# Allegro board Raspberry_Pi_Shield.brd
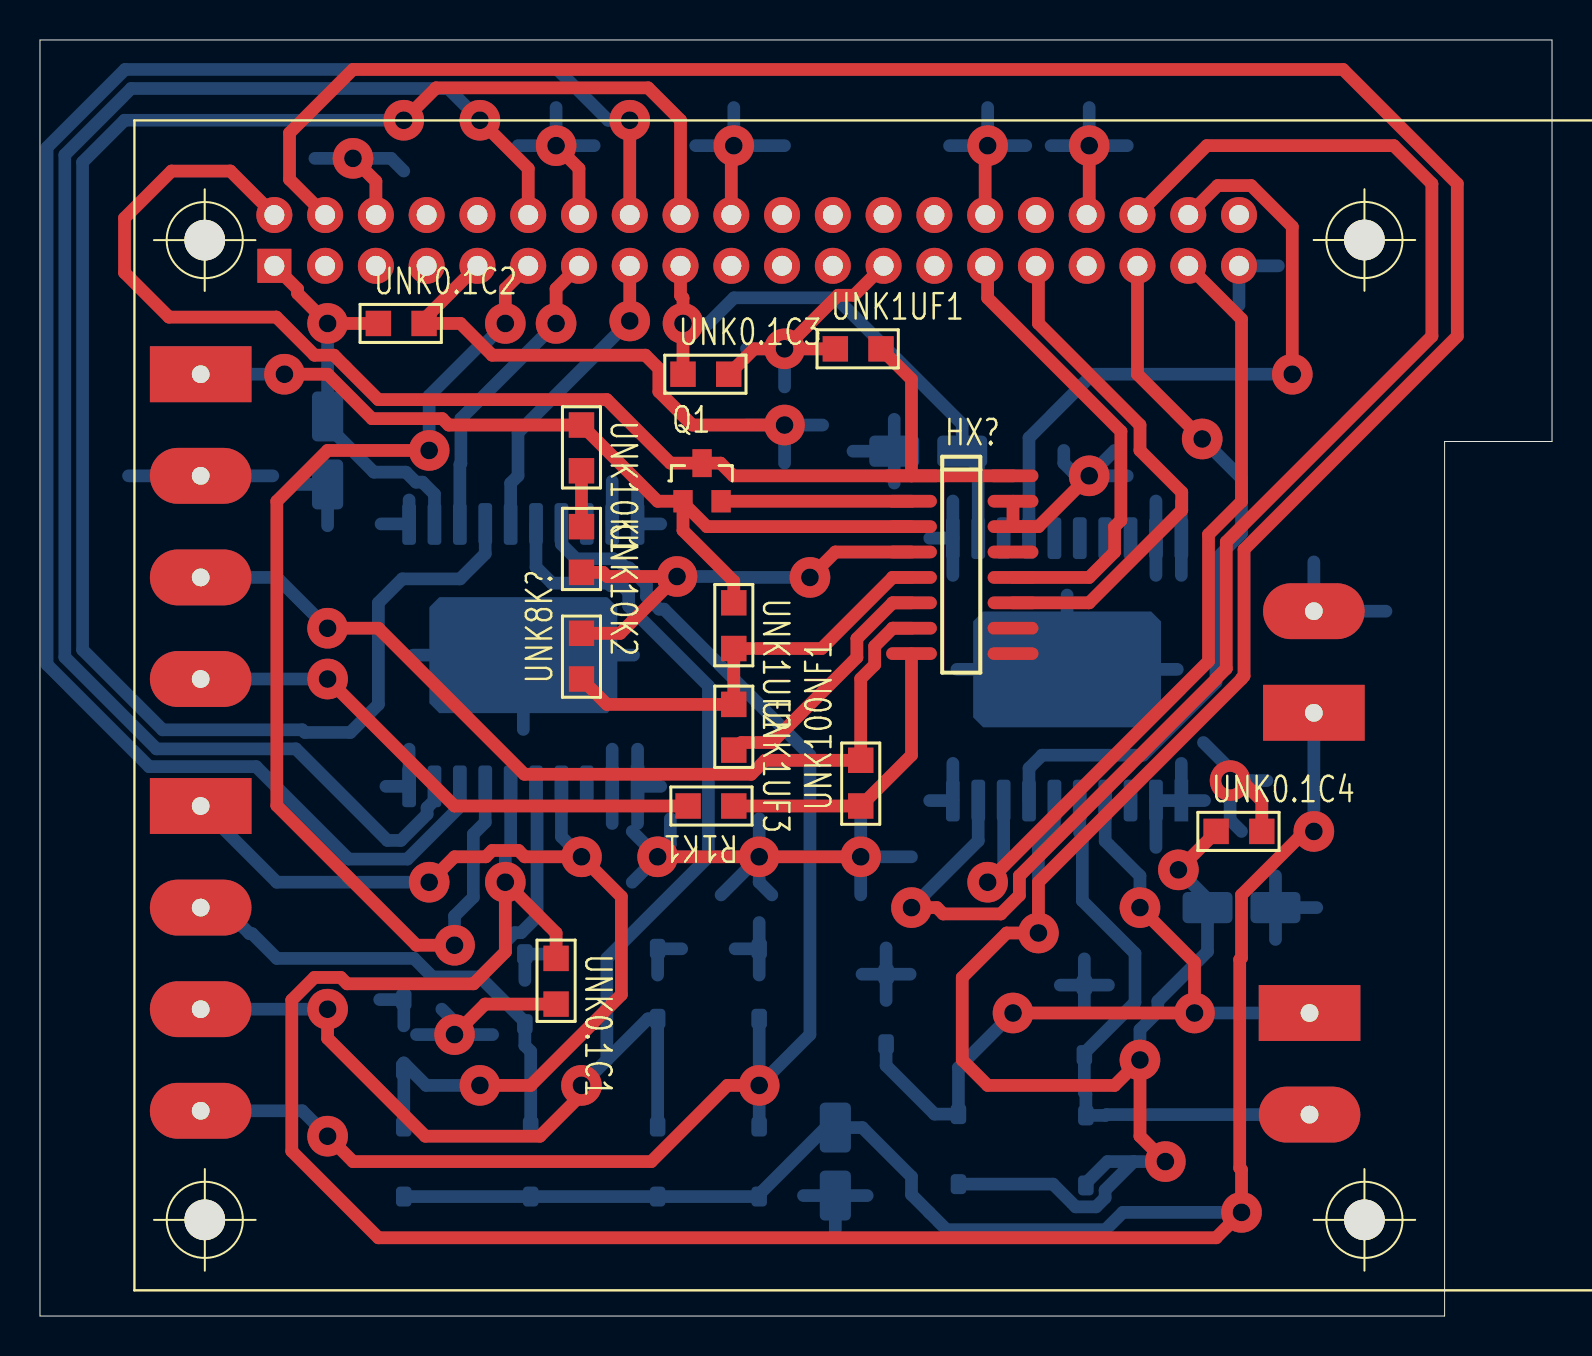
[diagram p0: board, top side]
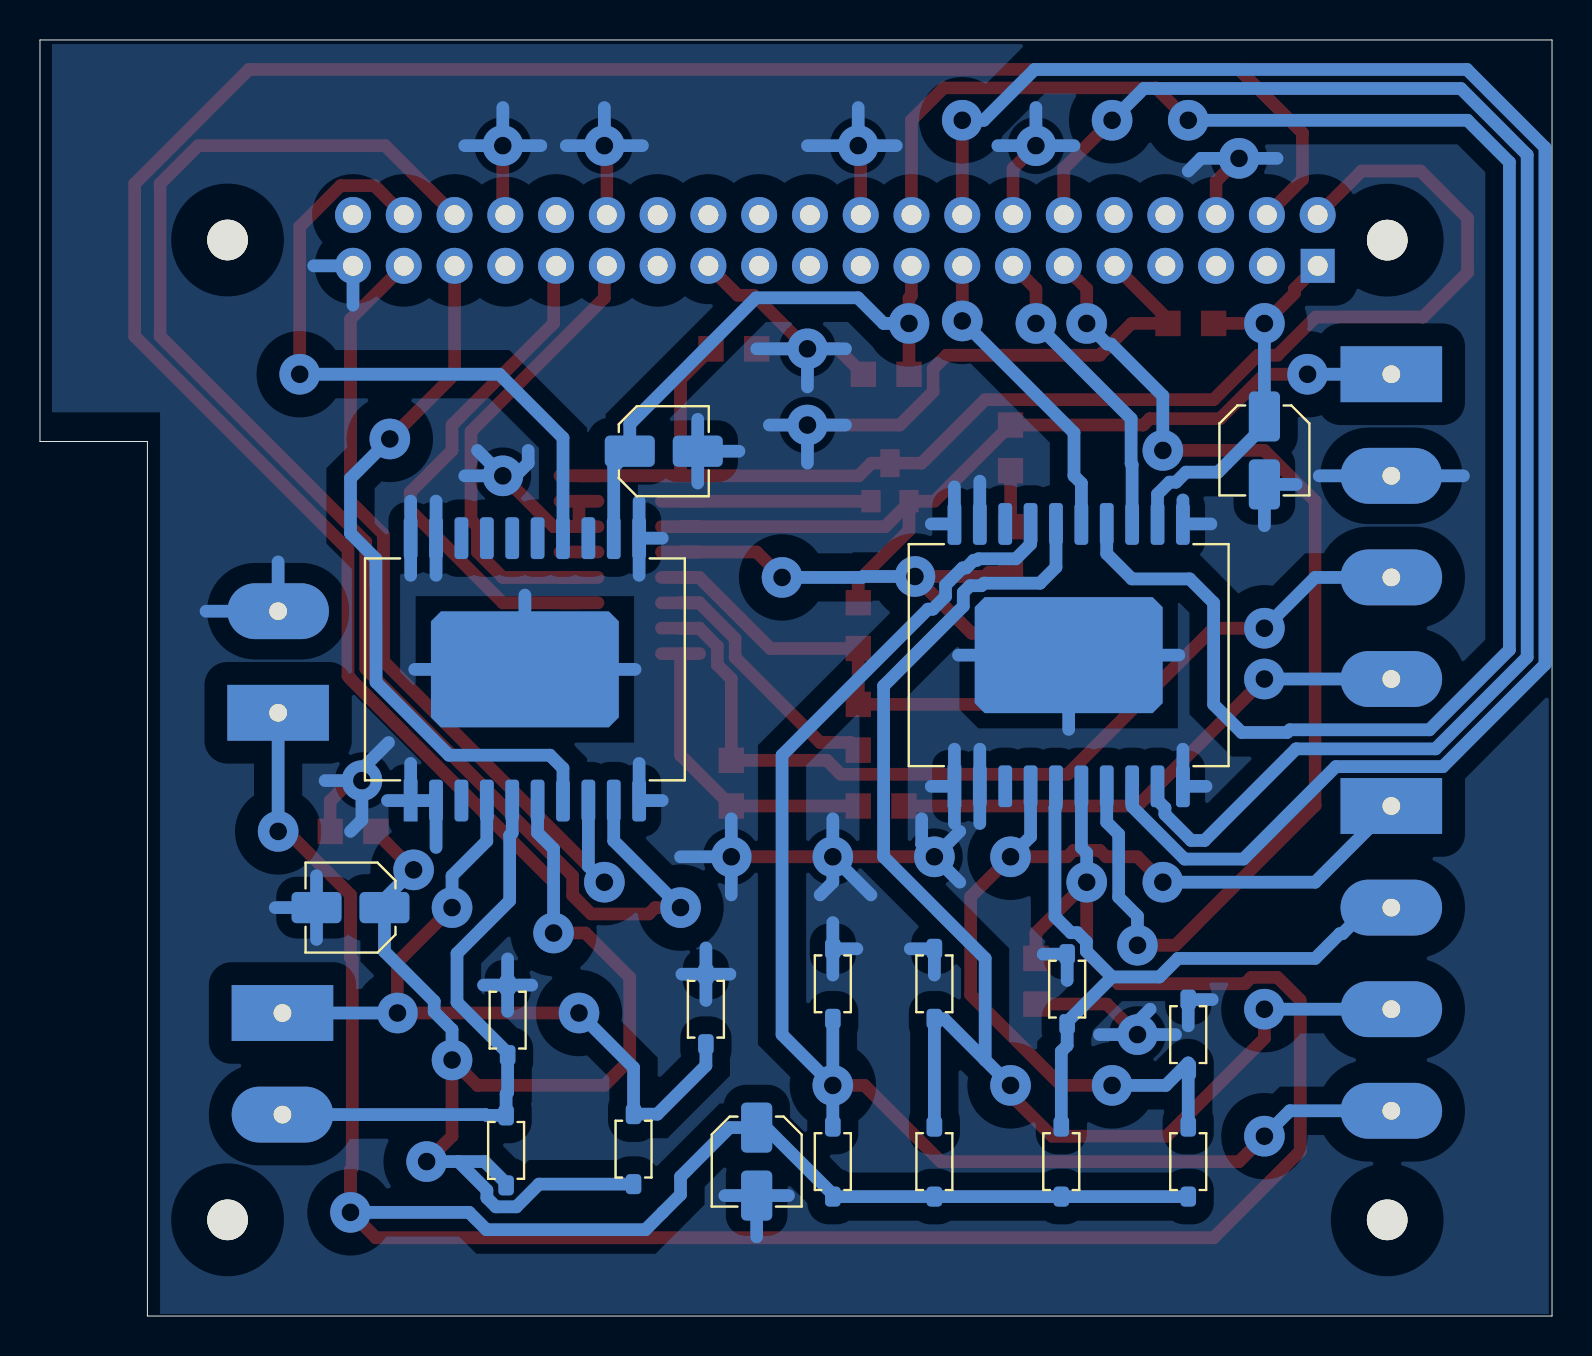
[diagram p1: board, bottom side, seen from below]

Outline 75.64 x 63.8 mm; copper layers: TOP, BOTTOM. Coordinates in mm from the lower left corner of the outline.
Outline path: 0,63.8 0,0 70.27,0 70.27,43.73 75.64,43.73 75.64,63.8 0,63.8

## Design rules (mm)
constraint set DEFAULT: min track width 0.635

## Placement (name value [footprint] x y rotation side)
D1  D_1N5814  [GU-SOD-123]  18.2 7.72 90 bottom
D2  D_1N5814  [GU-SOD-123]  24.55 7.72 90 bottom
D3  D_1N5814  [GU-SOD-123]  30.9 7.72 90 bottom
D4  D_1N5814  [GU-SOD-123]  35.98 7.72 90 bottom
D5  D_1N5814  [GU-SOD-123]  18.2 14.07 90 bottom
D6  D_1N5814  [GU-SOD-123]  24.26 16.34 90 bottom
D7  D_1N5814  [GU-SOD-123]  30.9 16.61 90 bottom
D8  D_1N5814  [GU-SOD-123]  35.98 16.61 90 bottom
D9  D_1N5814  [GU-SOD-123]  45.95 8.34 90 bottom
D10  D_1N5814  [GU-SOD-123]  52.32 8.28 90 bottom
D11  D_1N5814  [GU-SOD-123]  42.33 15.34 90 bottom
D12  D_1N5814  [GU-SOD-123]  52.25 14.8 90 bottom
HX?  HX711  [GU-SOIC16]  43.6 42.01 270 top
L1  L298  [GU-L298-POWERSO20]  24.18 33.05 180 bottom
L2  L298  [GU-L298-POWERSO20]  51.38 32.33 180 bottom
NOREF  -  [unnamed]  66.26 4.81 0 top
NOREF#2  -  [unnamed]  66.26 53.8 0 top
NOREF#3  -  [unnamed]  8.24 53.8 0 top
NOREF#4  -  [unnamed]  8.25 4.81 0 top
Q1  PNP_Transistor  [GU-SOT23]  32.17 40.74 0 top
R1K1  R1K  [GU-R0805]  34.71 25.5 180 top
U1  Pi Header  [GU-RASP-PI-3]  4.72 1.28 0 top
U9  connector2  [GU-TERMINAL2-200]  63.73 30.16 180 top
U10  connector2  [GU-TERMINAL2-200]  63.51 15.15 0 top
U11  connector4  [GU-TERMINAL4-200]  8.04 47.09 0 top
U12  con4  [GU-TERMINAL4-200]  8.04 25.5 0 top
U17  Cap_e  [CAPAE430X550D460L180X65]  14.39 43.28 270 bottom
U18  Cap_e  [CAPAE430X550D460L180X65]  39.79 7.72 270 bottom
U19  Cap_e  [CAPAE430X550D460L180X65]  44.44 43.24 180 bottom
U20  Cap_e  [CAPAE430X550D460L180X65]  60.11 20.42 0 bottom
UNK0.1C1  100nF_Capacitor  [GU-C0805]  25.82 17.88 270 top
UNK0.1C2  100nF_Capacitor  [GU-C0805]  16.93 49.63 0 top
UNK0.1C3  100nF_Capacitor  [GU-C0805]  32.17 47.09 0 top
UNK0.1C4  100nF_Capacitor  [GU-C0805]  58.84 24.23 0 top
UNK1UF1  1uF_Capacitor  [GU-C0805]  39.79 48.36 0 top
UNK1UF2  1uF_Capacitor  [GU-C0805]  34.71 35.66 270 top
UNK1UF3  1uF_Capacitor  [GU-C0805]  34.71 30.58 270 top
UNK8K?  8K2_ Resistor  [GU-R0805]  27.09 31.85 90 top
UNK10K1  10K_Resistor  [GU-R0805]  27.09 44.55 270 top
UNK10K2  10K_Resistor  [GU-R0805]  27.09 39.47 270 top
UNK100NF1  100nF_Capacitor  [GU-C0805]  41.06 25.5 90 top

## Library data of the parts
D1-D12 = D_1N5814
HX? = HX711
L1 L2 = L298
Q1 = PNP_Transistor
R1K1 = R1K
U1 = Pi Header
U9 U10 = connector2: User Part Number: TERMINAL2-200
U11 = connector4: User Part Number: TERMINAL4-200
U12 = con4: User Part Number: TERMINAL4-200
U17-U20 = Cap_e
UNK0.1C1-UNK0.1C4 UNK100NF1 = 100nF_Capacitor
UNK1UF1-UNK1UF3 = 1uF_Capacitor
UNK8K? = 8K2_ Resistor
UNK10K1 UNK10K2 = 10K_Resistor

## Footprints (pads in the part's own frame, mm; a bottom-side part is the same pattern mirrored in y, then rotated)
CAPAE430X550D460L180X65
  rrect 2.5x1.56 smd: 1(-1.7,0) 2(1.7,0)
GU-C0805
  rect 1.27x1.27 smd: 1(0,0) 2(2.286,0)
GU-L298-POWERSO20
  rect 0.69x2.09 smd: 1(-5.715,-6.56)
  rrect 0.69x2.09 smd: 2(-4.445,-6.56) 3(-3.175,-6.56) 4(-1.905,-6.56) 5(-0.635,-6.56) 6(0.635,-6.56) 7(1.905,-6.56) 8(3.175,-6.56) 9(4.445,-6.56) 10(5.715,-6.56) 11(5.715,6.56) 12(4.445,6.56) 13(3.175,6.56) 14(1.905,6.56) 15(0.635,6.56) 16(-0.635,6.56) 17(-1.905,6.56) 18(-3.175,6.56) 19(-4.445,6.56) 20(-5.715,6.56)
  rrect 9.4x5.8 smd: 21(0,0)
GU-R0805
  rect 1.27x1.27 smd: 1(0,0) 2(2.286,0)
GU-RASP-PI-3
  round 1 hole 3 unplated: (3.5,52.5) (3.5,3.5) (61.5,52.5) (61.5,3.5)
  rect 1.7x1.7 hole 1: 1(7,51.23)
  round 1.8 hole 1: 2(7,53.77) 3(9.54,51.23) 4(9.54,53.77) 5(12.08,51.23) 6(12.08,53.77) 7(14.62,51.23) 8(14.62,53.77) 9(17.16,51.23) 10(17.16,53.77) 11(19.7,51.23) 12(19.7,53.77) 13(22.24,51.23) 14(22.24,53.77) 15(24.78,51.23) 16(24.78,53.77) 17(27.32,51.23) 18(27.32,53.77) 19(29.86,51.23) 20(29.86,53.77) 21(32.4,51.23) 22(32.4,53.77) 23(34.94,51.23) 24(34.94,53.77) 25(37.48,51.23) 26(37.48,53.77) 27(40.02,51.23) 28(40.02,53.77) 29(42.56,51.23) 30(42.56,53.77) 31(45.1,51.23) 32(45.1,53.77) 33(47.64,51.23) 34(47.64,53.77) 35(50.18,51.23) 36(50.18,53.77) 37(52.72,51.23) 38(52.72,53.77) 39(55.26,51.23) 40(55.26,53.77)
GU-SOD-123
  rrect 1x0.78 smd: A(1.75,0) C(-1.75,0)
GU-SOIC16
  rect 0.635x2.54 smd: 1(0,0)
  oval 0.635x2.54 smd: 2(1.27,0) 3(2.54,0) 4(3.81,0) 5(5.08,0) 6(6.35,0) 7(7.62,0) 8(8.89,0) 9(8.89,5.08) 10(7.62,5.08) 11(6.35,5.08) 12(5.08,5.08) 13(3.81,5.08) 14(2.54,5.08) 15(1.27,5.08) 16(0,5.08)
GU-SOT23
  rect 0.965x1.118 smd: 1(0,0) 2(1.905,0)
  rect 0.965x1.397 smd: 3(0.953,1.905)
GU-TERMINAL2-200
  rect 5.08x2.794 hole 0.889: 1(0,0)
  oval 5.08x2.794 hole 0.889: 2(0,-5.08)
GU-TERMINAL4-200
  rect 5.08x2.794 hole 0.889: 1(0,0)
  oval 5.08x2.794 hole 0.889: 2(0,-5.08) 3(0,-10.16) 4(0,-15.24)
unnamed
  round 2.032 hole 3.962 unplated: (0,0)

## Nets
GND: D5.A D6.A D7.A D8.A D11.A D12.A HX?.14(X1) HX?.15 L1.1 L1.2 L1.10 L1.11 L1.19 L1.20 L1.21 L2.1 L2.2 L2.10 L2.11 L2.19 L2.20 L2.21 U1.6 U1.9 U1.14 U1.20 U1.25 U1.30 U1.34 U1.39 U9.2(-) U11.2(E-) U17.2(-) U18.2(-) U19.2(-) U20.2(-) UNK0.1C1.2 UNK0.1C2.2 UNK0.1C3.2 UNK0.1C4.2 UNK1UF1.1
N03174: HX?.1 HX?.16 Q1.3 U1.2 UNK1UF1.2
N03240: HX?.2 Q1.2
N03248: HX?.3 Q1.1(E) U11.1 UNK1UF2.1 UNK10K1.1
N03368: HX?.4 UNK8K?.2 UNK10K2.2
N03376: HX?.7 U11.3 UNK100NF1.2
N03380: HX?.8 R1K1.1 UNK100NF1.1
N03420: HX?.5 UNK1UF2.2 UNK1UF3.1 UNK8K?.1
N03736: HX?.6 UNK1UF3.2
N08092: L1.12(VSS) U1.1 U17.1 UNK0.1C2.1
N08208: D1.C(OUT) D2.C(OUT) D3.C(OUT) D4.C(OUT) L1.6 U9.1 U18.1 UNK0.1C1.1
N08462: L1.7 U1.11
N08526: L1.9 U1.12
N08530: D1.A D5.C(OUT) L1.4 U12.1
N08590: L1.13 U1.13
N08598: L1.15 U1.15
N08610: D2.A D6.C(OUT) L1.5 U12.2
N08622: D3.A D7.C(OUT) L1.16 U12.3
N08718: D4.A D8.C(OUT) L1.17 U12.4(OUT4)
N08730: L1.14 U1.18
N13573: L1.8 U1.16
N22204: L2.12(VSS) U1.17 U19.1 UNK0.1C3.1
N22212: D9.C(OUT) D10.C(OUT) L2.6 U1.4 U20.1 UNK0.1C4.1
N22636: D10.A D12.C(OUT) L2.5 U10.2(-)
N22732: L2.7 U1.35
N22740: D9.A D11.C(OUT) L2.4 U10.1
N22764: L2.9 U1.36
N23100: L2.14 U1.38
N23140: L2.8 U1.37
N25484: HX?.12 U1.29
N25496: HX?.11 U1.31
N28539: R1K1.2(OUT) U11.4
N386561: UNK10K1.2 UNK10K2.1

Pads without a net: HX? 9 10 13; L1 3 18; L2 3 13 15 16 17 18; U1 3 5 7 8 10 19 21 22 23 24 26 27 28 32 33 40

## Via types
v1: diameter 2.032, hole 0.889, TOP to BOTTOM, 49 vias

## Routing (per net, layer and track width the routed paths; a pad name or vN(x,y) marks a point on that pad's centre or on a via; arc(x,y) is an arc through that point)
GND: length 287
  TOP w0.635: v1(37.25,48.36) 39.93,51.04 40.73,51.04 U1.25 ; v1(37.25,48.36) UNK1UF1.1 ; v1(37.25,48.36) 35.73,48.36 UNK0.1C3.2 ; U1.30 47.28,58.4 v1(47.41,58.52) ; UNK0.1C1.2 22.26,15.6 v1(20.74,14.07) ; UNK0.1C4.2 61.13,25.76 60.11,26.77 v1(59.54,26.77) ; v1(41.06,22.96) v1(35.98,22.96) v1(30.9,22.96) ; HX?.15 HX?.14 49.95,39.47 v1(52.49,42.01) ; U1.9 19.22,49.84 UNK0.1C2.2 21.03,49.63 22.62,48.04 30.29,48.04 30.96,47.37 30.96,46.22 32.63,44.55 v1(37.25,44.55) ; v1(34.71,58.52) 34.58,58.4 U1.20 ; v1(15.66,57.89) 16.8,56.74 U1.6 ; U1.34 52.49,55.18 v1(52.49,58.52) ; v1(25.82,58.52) 26.96,57.38 U1.14
  BOTTOM w0.635: 36.61,21.06 35.98,21.69 v1(35.98,22.96) ; 17,15.82 D5.A 18.2,14.51 ; 25.46,18.09 D6.A 24.26,16.78 ; 34.78,18.36 D8.A ; D8.A 35.98,17.05 ; D8.A 35.98,19.68 ; L2.1 57.1,27.63 ; L2.1 L2.2 55.83,23.43 ; L2.1 58.26,25.77 ; v1(30.9,22.96) 31.53,23.6 31.53,24.87 ; v1(30.9,22.96) 29.63,21.69 ; v1(30.9,22.96) 29.63,24.23 ; D12.A 53.45,16.55 ; D12.A 51.04,16.55 ; D12.A 52.25,17.86 ; D12.A 52.25,15.23 ; 41.13,17.09 D11.A ; D11.A 42.33,15.78 ; D11.A 43.53,17.09 ; D11.A 42.33,18.41 ; 17.31,26.49 L1.10 18.47,28.34 ; v1(20.74,14.07) 18.83,14.07 ; v1(20.74,14.07) 22.64,14.07 ; v1(20.74,14.07) 20.74,14.71 20.1,15.34 ; L1.1 31.05,26.49 ; L1.1 29.9,28.34 ; L1.1 29.9,24.63 ; v1(52.49,58.52) 50.58,58.52 ; v1(52.49,58.52) 54.39,58.52 ; v1(52.49,58.52) 52.49,60.43 ; v1(41.06,22.96) 41.06,24.87 ; v1(41.06,22.96) 41.06,21.06 ; v1(41.06,22.96) 43.6,22.96 ; v1(25.82,58.52) 23.91,58.52 ; v1(25.82,58.52) 25.82,60.43 ; v1(25.82,58.52) 27.72,58.52 ; 13.75,57.89 v1(15.66,57.89) 17.56,57.89 18.2,57.25 ; U19.2 42.74,44.84 ; U19.2 42.74,41.65 ; U19.2 40.67,43.24 ; v1(37.25,48.36) UNK1UF1.1 ; v1(37.25,48.36) 37.25,46.46 ; v1(37.25,48.36) 35.34,48.36 ; 30.9,17.05 D7.A 32.1,18.36 ; v1(52.49,42.01) 54.39,42.01 ; v1(52.49,42.01) 51.85,42.01 51.22,42.65 51.22,43.28 ; v1(52.49,42.01) 53.76,43.28 ; 47.41,60.43 v1(47.41,58.52) ; v1(47.41,58.52) 49.31,58.52 ; v1(47.41,58.52) 45.5,58.52 ; 4.43,42.01 U11.2 11.65,42.01 ; 61.95,52.51 U1.39 59.98,50.55 ; v1(35.98,22.96) 34.07,21.06 ; v1(35.98,22.96) 35.98,24.87 ; 34.71,60.43 v1(34.71,58.52) ; v1(34.71,58.52) 37.25,58.52 ; v1(34.71,58.52) 32.8,58.52 ; L2.11 45.67,40.75 ; L2.11 44.51,38.89 ; L2.11 45.67,37.04 ; v1(59.54,26.77) 59.54,27.34 58.2,28.68 ; v1(59.54,26.77) 61.38,26.77 ; v1(59.54,26.77) 59.54,24.8 60.11,24.23 ; 17.06,39.61 L1.11 18.47,40.81 ; 14.39,39.52 U17.2 12.8,41.58 ; 18.67,33.05 L1.21 ; L1.21 29.69,33.05 ; L1.21 24.18,29.33 ; U20.2 63.87,20.42 ; U20.2 61.81,22.01 ; U20.2 61.81,18.83 ; 39.79,3.96 U18.2 ; U18.2 41.38,6.02 ; U18.2 38.2,6.02 ; 31.05,39.61 L1.20 29.9,41.46 ; 57.1,37.04 L2.20 57.1,40.75 ; 39.15,44.55 v1(37.25,44.55) ; v1(37.25,44.55) 37.25,42.65 ; v1(37.25,44.55) 35.34,44.55 ; 44.51,25.77 L2.10 45.67,27.63 ; 55.83,40.75 L2.19 55.83,37.04 ; 63.73,37.71 U9.2 67.34,35.24 ; L2.21 51.38,36.05 ; L2.21 56.9,32.33 ; L2.21 45.87,32.33 ; 28.63,28.34 L1.2 28.63,24.63 ; L1.19 28.63,41.74
N03174: length 67.7
  TOP w0.635: HX?.1 43.6,46.84 UNK1UF1.2 ; HX?.1 34.68,42.01 34.05,42.65 31.53,42.65 28.36,45.82 16.93,45.82 14.71,48.04 13.73,48.04 11.83,49.95 6.45,49.95 4.23,52.17 4.23,54.9 6.58,57.25 9.53,57.25 U1.2 ; HX?.1 HX?.16
N03240: length 9.5
  TOP w0.635: HX?.2 Q1.2
N03248: length 44.8
  TOP w0.635: 32.17,40.67 32.17,39.28 34.71,36.74 UNK1UF2.1 ; 32.17,40.67 33.36,39.47 HX?.3 ; 32.17,40.67 Q1.1 30.9,40.74 UNK10K1.1 20.44,44.55 20.13,44.87 16.61,44.87 14.39,47.09 v1(12.23,47.09)
  BOTTOM w0.635: v1(12.23,47.09) U11.1
N03368: length 23.1
  TOP w0.635: v1(38.52,36.93) 39.79,38.2 HX?.4 ; UNK10K2.2 28.17,37.19 28.38,36.98 v1(31.87,36.98) 29.03,34.14 UNK8K?.2
  BOTTOM w0.635: v1(38.52,36.93) 34.52,36.93 34.47,36.98 v1(31.87,36.98)
N03376: length 45.6
  TOP w0.635: v1(14.39,34.39) 16.93,34.39 24.23,27.09 35.58,27.09 36.28,27.79 UNK100NF1.2 41.06,31.86 41.76,32.56 41.76,33.49 42.66,34.39 HX?.7
  BOTTOM w0.635: v1(14.39,34.39) 11.85,36.93 U11.3
N03380: length 15
  TOP w0.635: HX?.8 43.6,28.04 UNK100NF1.1 R1K1.1
N03420: length 21.3
  TOP w0.635: HX?.5 42.66,36.93 39.1,33.38 UNK1UF2.2 UNK1UF3.1 28.36,30.58 UNK8K?.1
N03736: length 12.5
  TOP w0.635: UNK1UF3.2 35.09,28.68 36.61,28.68 40.87,32.93 40.87,33.87 42.66,35.66 HX?.6
N08092: length 19.9
  TOP w0.635: U1.1 12.89,51.35 12.89,51.13 v1(14.39,49.63) UNK0.1C2.1
  BOTTOM w0.635: L1.12 19.74,41.09 19.14,41.69 18.81,41.69 18.31,42.19 16.71,42.19 14.39,44.51 U17.1 v1(14.39,49.63)
N08208: length 155.8
  TOP w0.635: v1(63.73,24.23) 63.28,24.23 60.11,21.06 60.11,17.91 60.02,17.82 60.02,7.4 60.11,7.31 v1(60.11,5.18) 58.84,3.91 16.93,3.91 12.6,8.24 12.6,15.8 13.73,16.93 15.05,16.93 15.36,16.61 21.69,16.61 23.28,18.2 v1(23.28,21.69) 25.82,19.15 UNK0.1C1.1
  BOTTOM w0.635: v1(60.11,5.18) 54.17,5.18 53.31,4.32 45.35,4.32 44.49,5.18 43.6,6.07 43.6,6.96 41.14,9.42 U18.1 39.32,9.42 35.98,6.08 D4.C D3.C D2.C D1.C ; v1(23.28,21.69) 23.28,23.15 23.55,23.42 L1.6 ; U9.1 v1(63.73,24.23)
N08462: length 55.6
  TOP w0.635: v1(23.28,49.63) 23.28,51.37 U1.11 ; v1(20.74,18.54) 18.83,18.54 11.85,25.53 11.85,40.74 14.39,43.28 v1(19.47,43.28)
  BOTTOM w0.635: L1.7 22.28,24.69 21.68,24.09 21.68,20.94 20.74,20 v1(20.74,18.54) ; v1(19.47,43.28) 19.47,46.01 22.06,48.6 22.25,48.6 v1(23.28,49.63)
N08526: length 77.7
  TOP w0.635: U1.12 24.42,57.38 v1(22.01,59.79)
  BOTTOM w0.635: L1.9 19.74,25.79 19.37,25.42 19.37,25.09 18.06,23.78 17.38,23.78 12.8,28.36 5.83,28.36 1.24,32.95 1.24,58.06 4.56,61.38 20.42,61.38 v1(22.01,59.79)
N08530: length 49.5
  TOP w0.635: v1(22.01,11.53) 24.55,11.53 29.08,16.07 29.08,20.97 v1(27.09,22.96) 24.25,22.96 23.94,23.28 22.62,23.28 22.3,22.96 20.74,22.96 v1(19.47,21.69)
  BOTTOM w0.635: D1.A D5.C 18.2,12.65 19.32,11.53 v1(22.01,11.53) ; v1(19.47,21.69) 11.85,21.69 U12.1 ; L1.4 26.09,23.96 v1(27.09,22.96)
N08590: length 15.4
  TOP w0.635: v1(25.82,49.63) 25.82,51.37 U1.13
  BOTTOM w0.635: L1.13 21.01,42.57 21.06,42.62 21.06,44.87 v1(25.82,49.63)
N08598: length 15.4
  TOP w0.635: U1.15 v1(29.5,49.76)
  BOTTOM w0.635: v1(29.5,49.76) 23.92,44.17 23.92,42.01 23.55,41.64 L1.15
N08610: length 34.9
  BOTTOM w0.635: L1.5 24.82,25.47 24.87,25.42 24.87,19.97 24.07,19.17 23.75,19.17 23.3,18.72 23.3,18.24 22.01,16.95 ; D2.A 24.55,13.23 24.26,13.52 D6.C 24.26,14.7 22.01,16.95 ; 22.01,16.95 19.64,16.95 18.71,17.88 11.85,17.88 10.61,19.12 10.48,19.12 9.18,20.42 U12.2
N08622: length 68.9
  TOP w0.635: v1(27.09,11.53) 27.09,11.07 25.01,8.99 19.28,8.99 14.39,13.88 v1(14.39,15.34)
  BOTTOM w0.635: L1.16 24.82,37.44 25.61,36.64 28.42,36.64 28.55,36.52 29.12,36.52 29.45,36.18 29.45,35.49 33.44,31.51 33.44,22.96 28.36,17.88 28.36,12.8 ; 28.36,12.8 30.42,14.86 D7.C D3.A ; 28.36,12.8 v1(27.09,11.53) ; U12.3 v1(14.39,15.34)
N08718: length 71.7
  TOP w0.635: v1(14.39,8.99) 15.66,7.72 30.58,7.72 34.39,11.53 v1(35.98,11.53)
  BOTTOM w0.635: U12.4 13.12,10.26 v1(14.39,8.99) ; D8.C v1(35.98,11.53) ; v1(35.98,11.53) 38.52,14.07 38.52,28.04 31.22,35.34 30.98,35.34 30.34,35.98 30.34,36.55 29.49,37.41 29.31,37.41 28.93,37.79 28.77,37.79 28.7,37.86 26.82,37.86 26.09,38.6 L1.17 ; v1(35.98,11.53) D4.A
N08730: length 91.3
  TOP w0.635: v1(18.2,59.79) 19.82,61.41 30.42,61.41 32.04,59.79 U1.18
  BOTTOM w0.635: L1.14 22.28,38.12 21.02,36.86 18.13,36.86 16.93,35.66 16.93,30.58 15.53,29.18 13.25,29.18 13.12,29.31 6.13,29.31 2.13,33.31 2.13,57.69 4.23,59.79 v1(18.2,59.79)
N13573: length 89.2
  TOP w0.635: v1(29.5,59.79) U1.16
  BOTTOM w0.635: L1.8 21.01,25.47 18.38,22.85 15.44,22.85 10.82,27.47 5.46,27.47 0.35,32.58 0.35,58.43 4.25,62.33 25.89,62.33 28.43,59.79 v1(29.5,59.79)
N22204: length 28.6
  TOP w0.635: UNK0.1C3.1 v1(32.17,49.63) 32.17,50.9 32.04,51.03 U1.17
  BOTTOM w0.635: L2.12 46.94,42.44 U19.1 46.14,44.6 39.82,50.91 34.72,50.91 33.44,49.63 v1(32.17,49.63)
N22212: length 173.6
  TOP w0.635: UNK0.1C4.1 58.84,24.2 v1(56.95,22.31) ; U1.4 12.48,56.83 12.48,59.16 15.66,62.33 65.19,62.33 70.9,56.62 70.9,49 60.24,38.33 60.24,32 60.11,31.88 60.11,31.85 49.95,21.69 v1(49.95,19.15) 48.36,19.15 46.14,16.93 46.14,12.8 47.41,11.53 53.76,11.53 v1(55.03,12.8) 55.03,8.99 v1(56.3,7.72)
  BOTTOM w0.635: 54.71,7.72 53.29,6.3 53.29,5.91 52.83,5.46 51.81,5.46 50.68,6.59 D9.C ; 54.71,7.72 v1(56.3,7.72) ; 54.71,7.72 53.41,7.72 52.32,6.64 D10.C ; v1(56.95,22.31) 58.41,20.85 U20.1 58.41,18.23 55.92,15.74 55.92,15.21 55.03,14.32 v1(55.03,12.8) ; L2.6 50.75,24.16 49.95,23.36 v1(49.95,19.15)
N22636: length 29.2
  BOTTOM w0.635: L2.5 52.02,24.16 52.15,24.03 52.15,20.76 54.78,18.13 54.78,15.69 52.25,13.16 D12.C 52.25,11.18 52.32,11.1 D10.A 53.31,10.03 53.35,10.07 U10.2
N22732: length 36.3
  TOP w0.635: U1.35 54.9,47.09 v1(58.14,43.85)
  BOTTOM w0.635: L2.7 49.48,27.39 50.13,28.04 55.18,28.04 58.83,31.69 58.84,37.86 60.11,39.13 60.11,41.89 v1(58.14,43.85)
N22740: length 39.2
  TOP w0.635: v1(48.68,15.15) v1(57.76,15.15) 57.76,17.69 v1(55.03,20.42)
  BOTTOM w0.635: U10.1 v1(57.76,15.15) ; v1(55.03,20.42) 55.03,22.01 53.29,23.75 L2.4 ; v1(48.68,15.15) 45.95,12.42 D9.A 44.76,10.09 42.33,12.52 D11.C
N22764: length 73.7
  TOP w0.635: v1(43.6,20.42) 44.87,20.42 45.19,20.1 48.07,20.1 49,21.03 49,22.01 58.84,31.85 58.84,31.86 59.35,32.37 59.35,38.71 69.63,49 69.63,56.62 67.73,58.52 58.37,58.52 U1.36
  BOTTOM w0.635: L2.9 46.94,23.76 v1(43.6,20.42)
N23100: length 33.5
  TOP w0.635: v1(62.65,47.09) 62.65,54.47 60.59,56.52 58.92,56.52 U1.38
  BOTTOM w0.635: v1(62.65,47.09) 52.66,47.09 49.48,43.91 L2.14
N23140: length 41.6
  TOP w0.635: v1(47.41,21.69) 58.46,32.74 58.46,39.08 60.11,40.73 60.11,49.85 U1.37
  BOTTOM w0.635: v1(47.41,21.69) 48.21,22.49 L2.8
N25484: length 22.9
  TOP w0.635: U1.29 47.41,52.39 47.41,50.9 54.08,44.23 54.08,39.79 53.76,39.47 53.76,38.2 52.49,36.93 HX?.12
N25496: length 25.6
  TOP w0.635: U1.31 49.95,52.39 49.95,49.63 55.03,44.55 55.03,43.28 57.12,41.19 57.12,40.29 52.49,35.66 HX?.11
N28539: length 27
  TOP w0.635: R1K1.2 20.74,25.5 v1(14.39,31.85)
  BOTTOM w0.635: v1(14.39,31.85) U11.4
N386561: length 2.8
  TOP w0.635: UNK10K1.2 UNK10K2.1

## Copper pours and planes (outline as drawn; the poured copper is in the pictures)
GND on BOTTOM: 0.16,63.6 0.16,0.1 69.63,0.1 69.63,45.19 75.04,45.19 75.04,63.6 ; 22 cut-outs
